# Altium PCB EPS.PcbDoc (part 1 of 2)
Units mm, origin at the board's own origin, x right, y up, seen from the top; angles counter-clockwise.
Board outline 98 x 78 mm, 4 copper layers (Top Layer, GND 1, GND 2, Bottom Layer), stack 1.592 mm thick; 124 components, 111 nets, 472 pads, 878 vias.
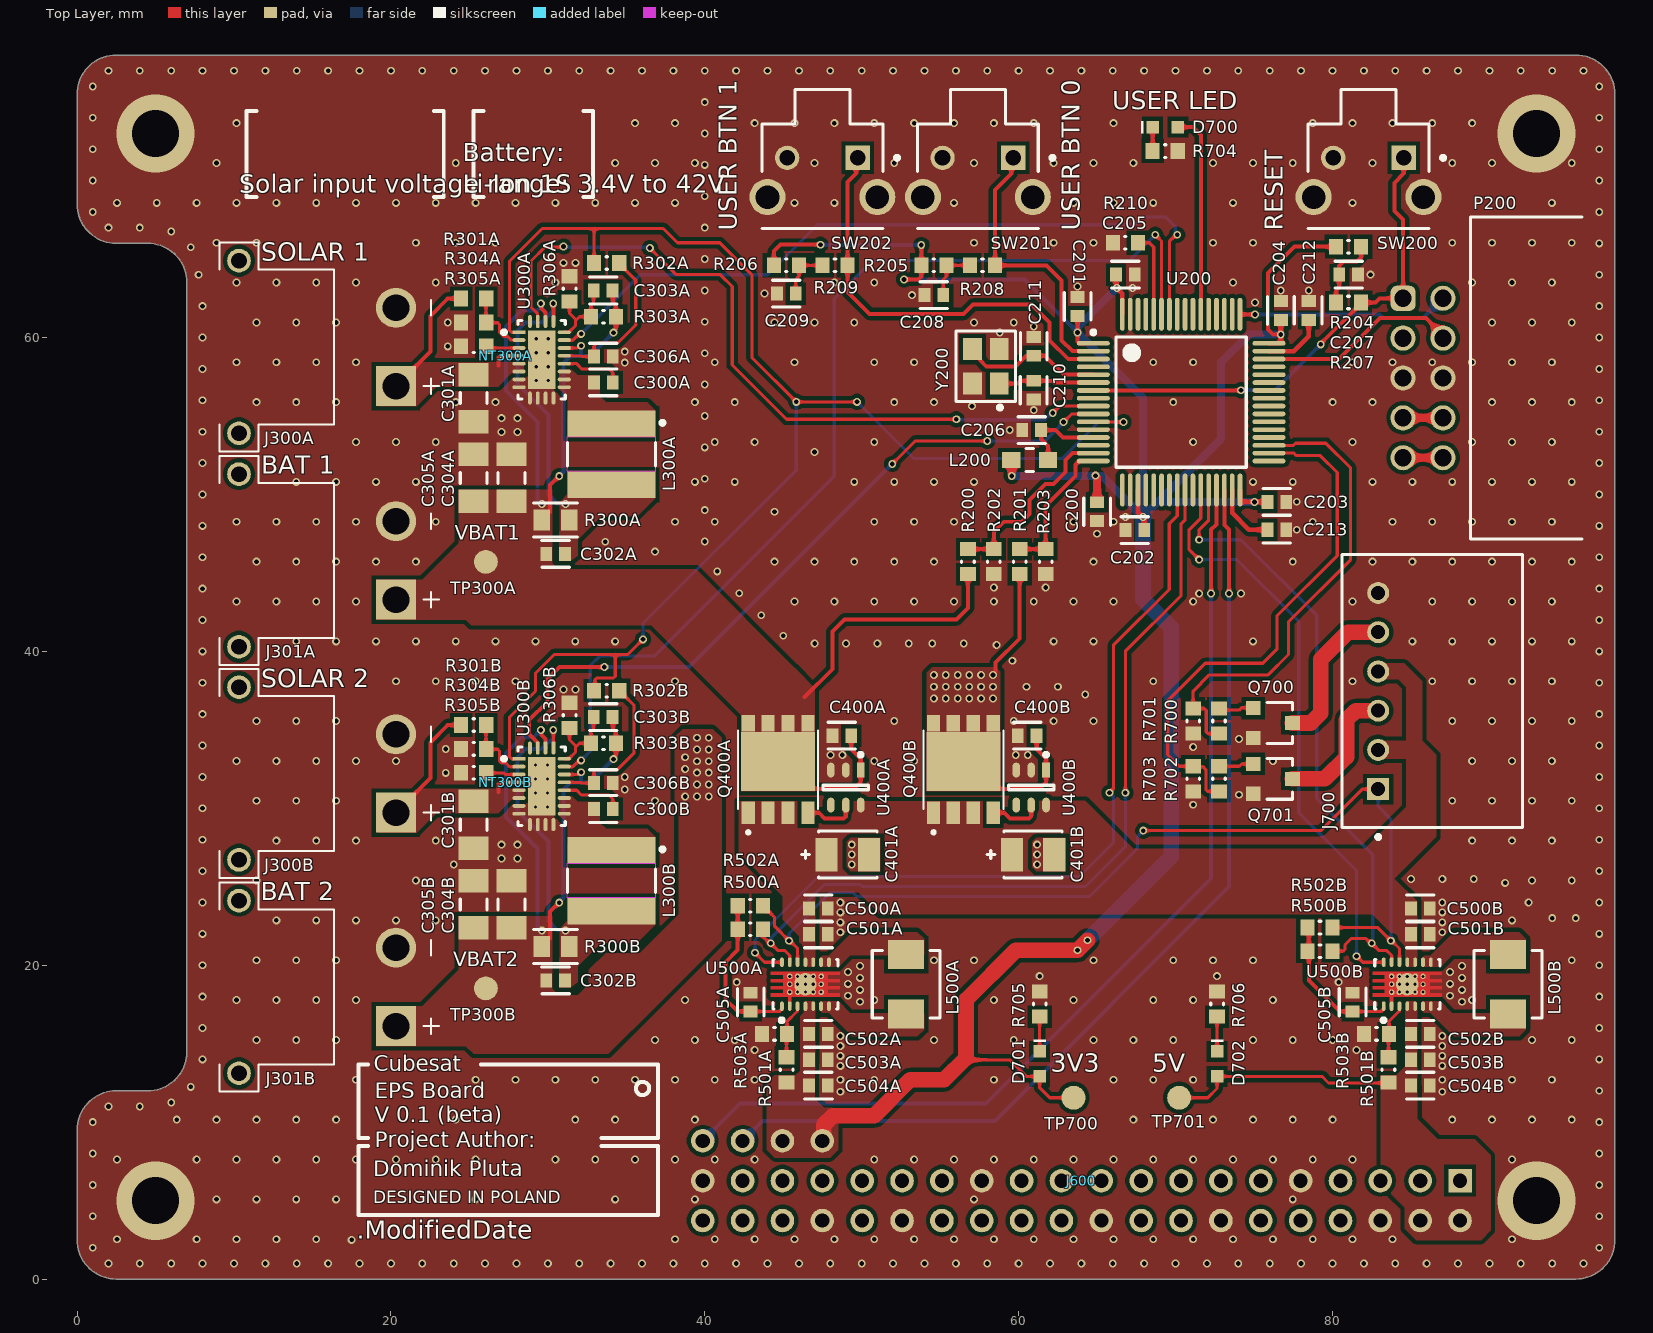
[diagram p0: Top Layer view]
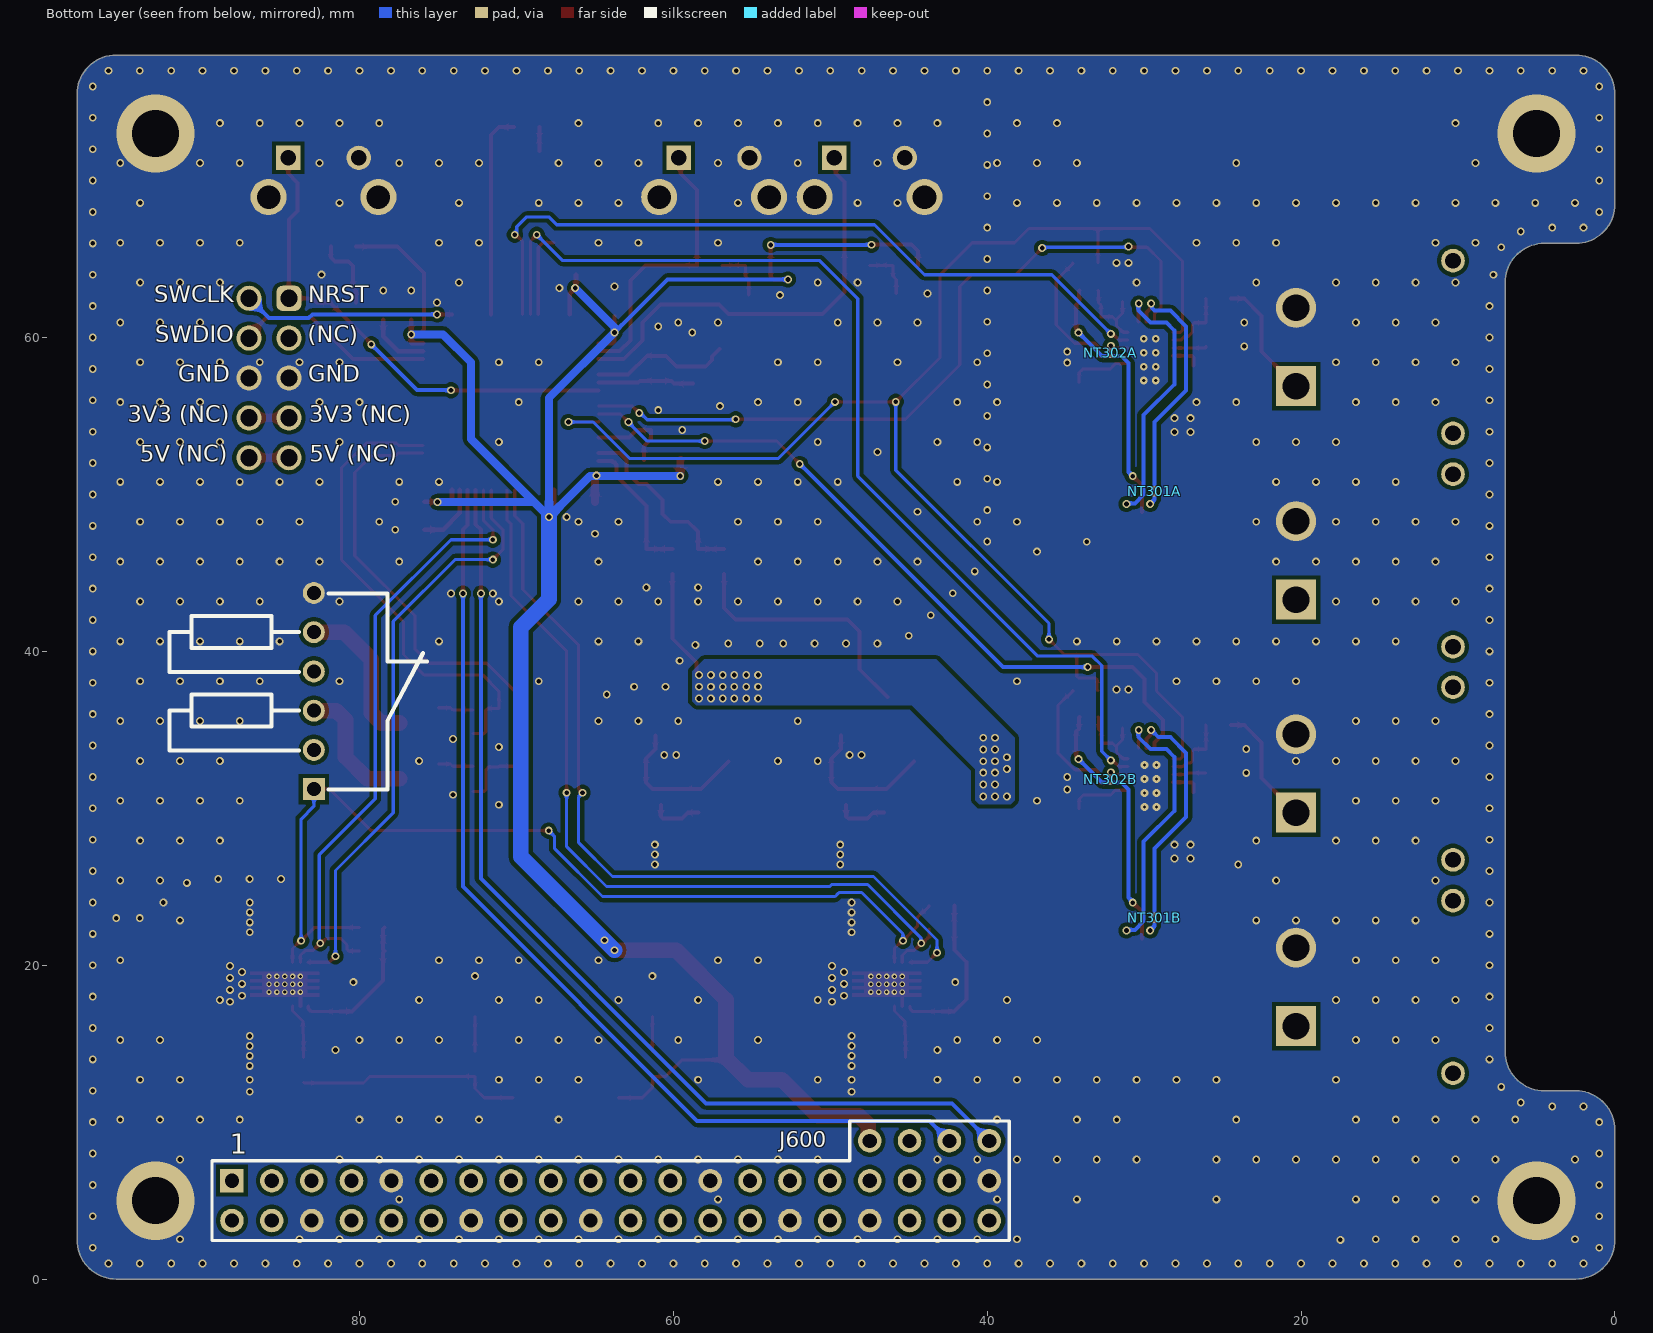
[diagram p1: Bottom Layer view, seen from below]
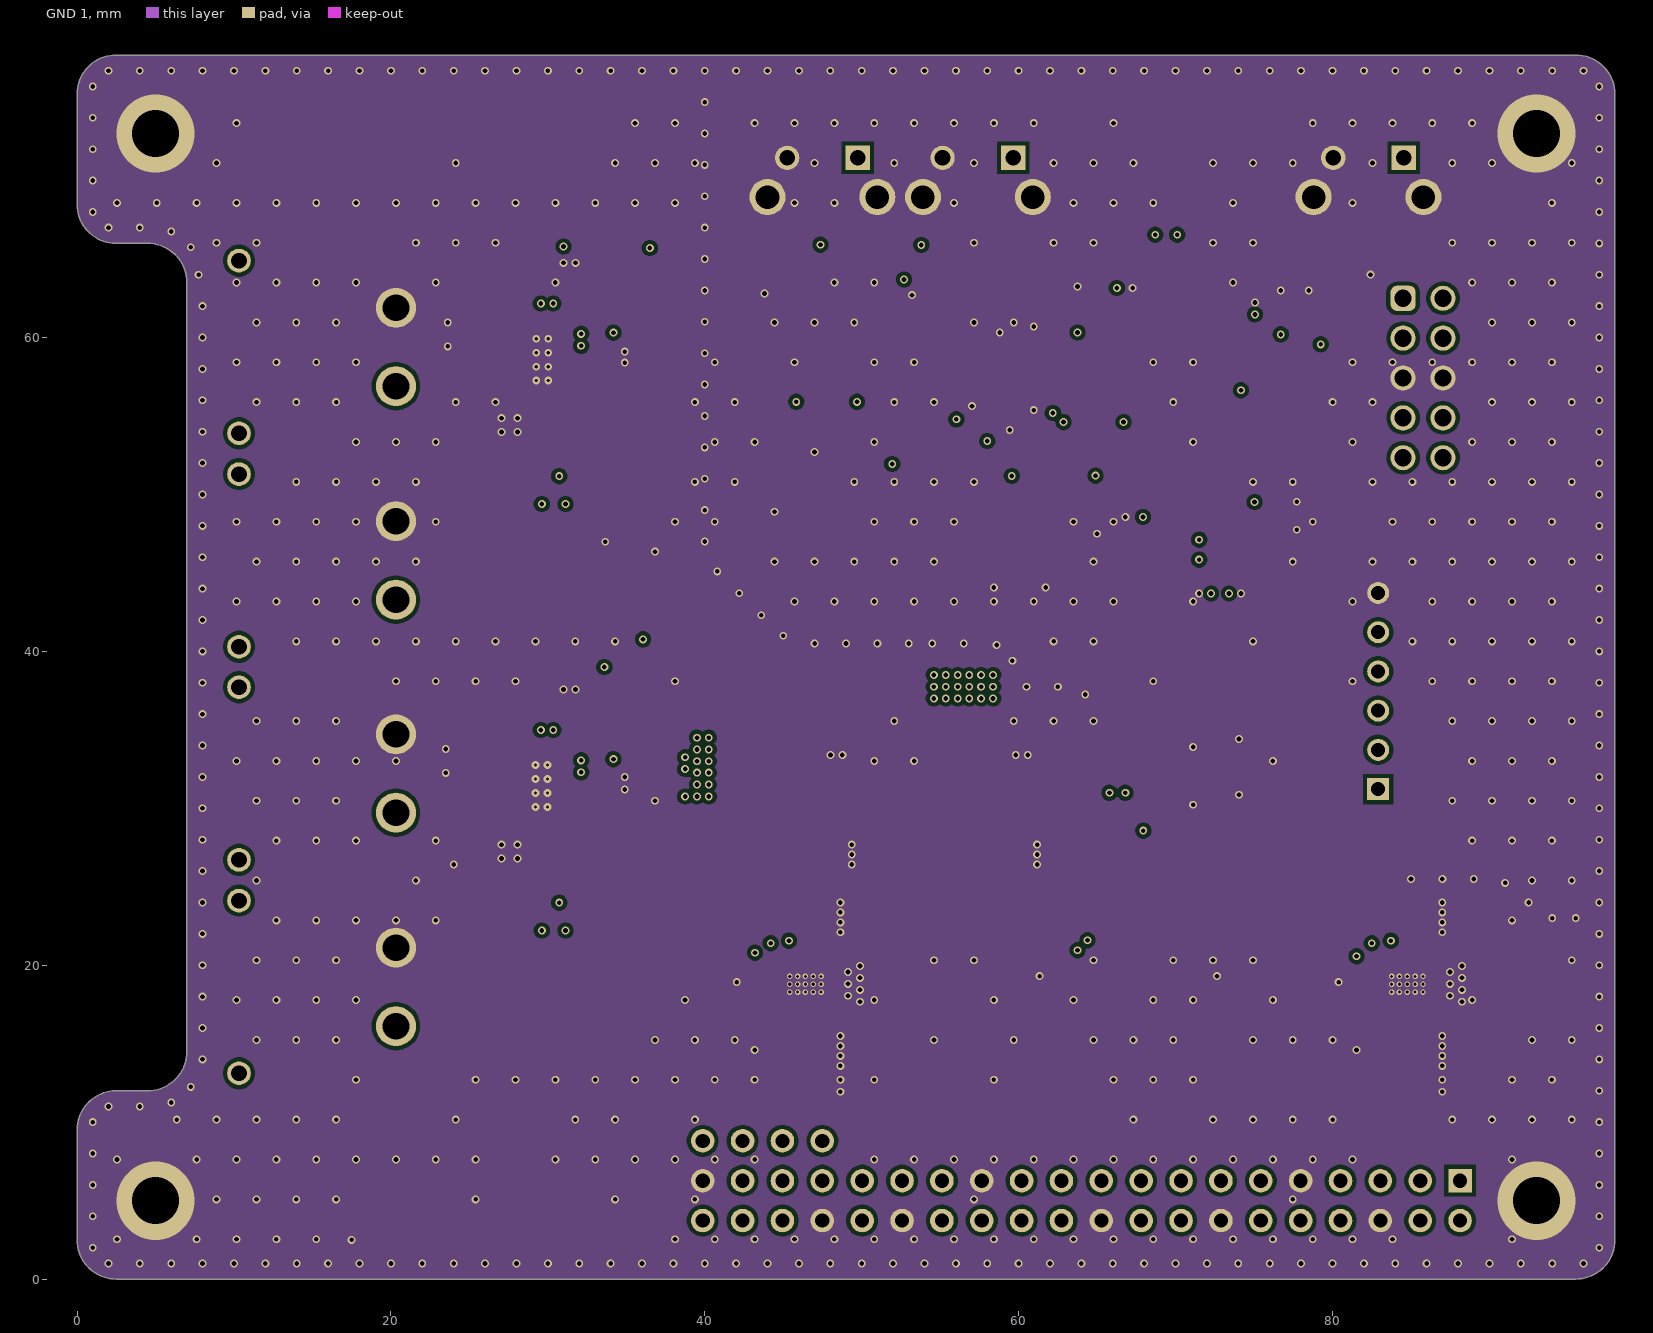
[diagram p2: GND 1]
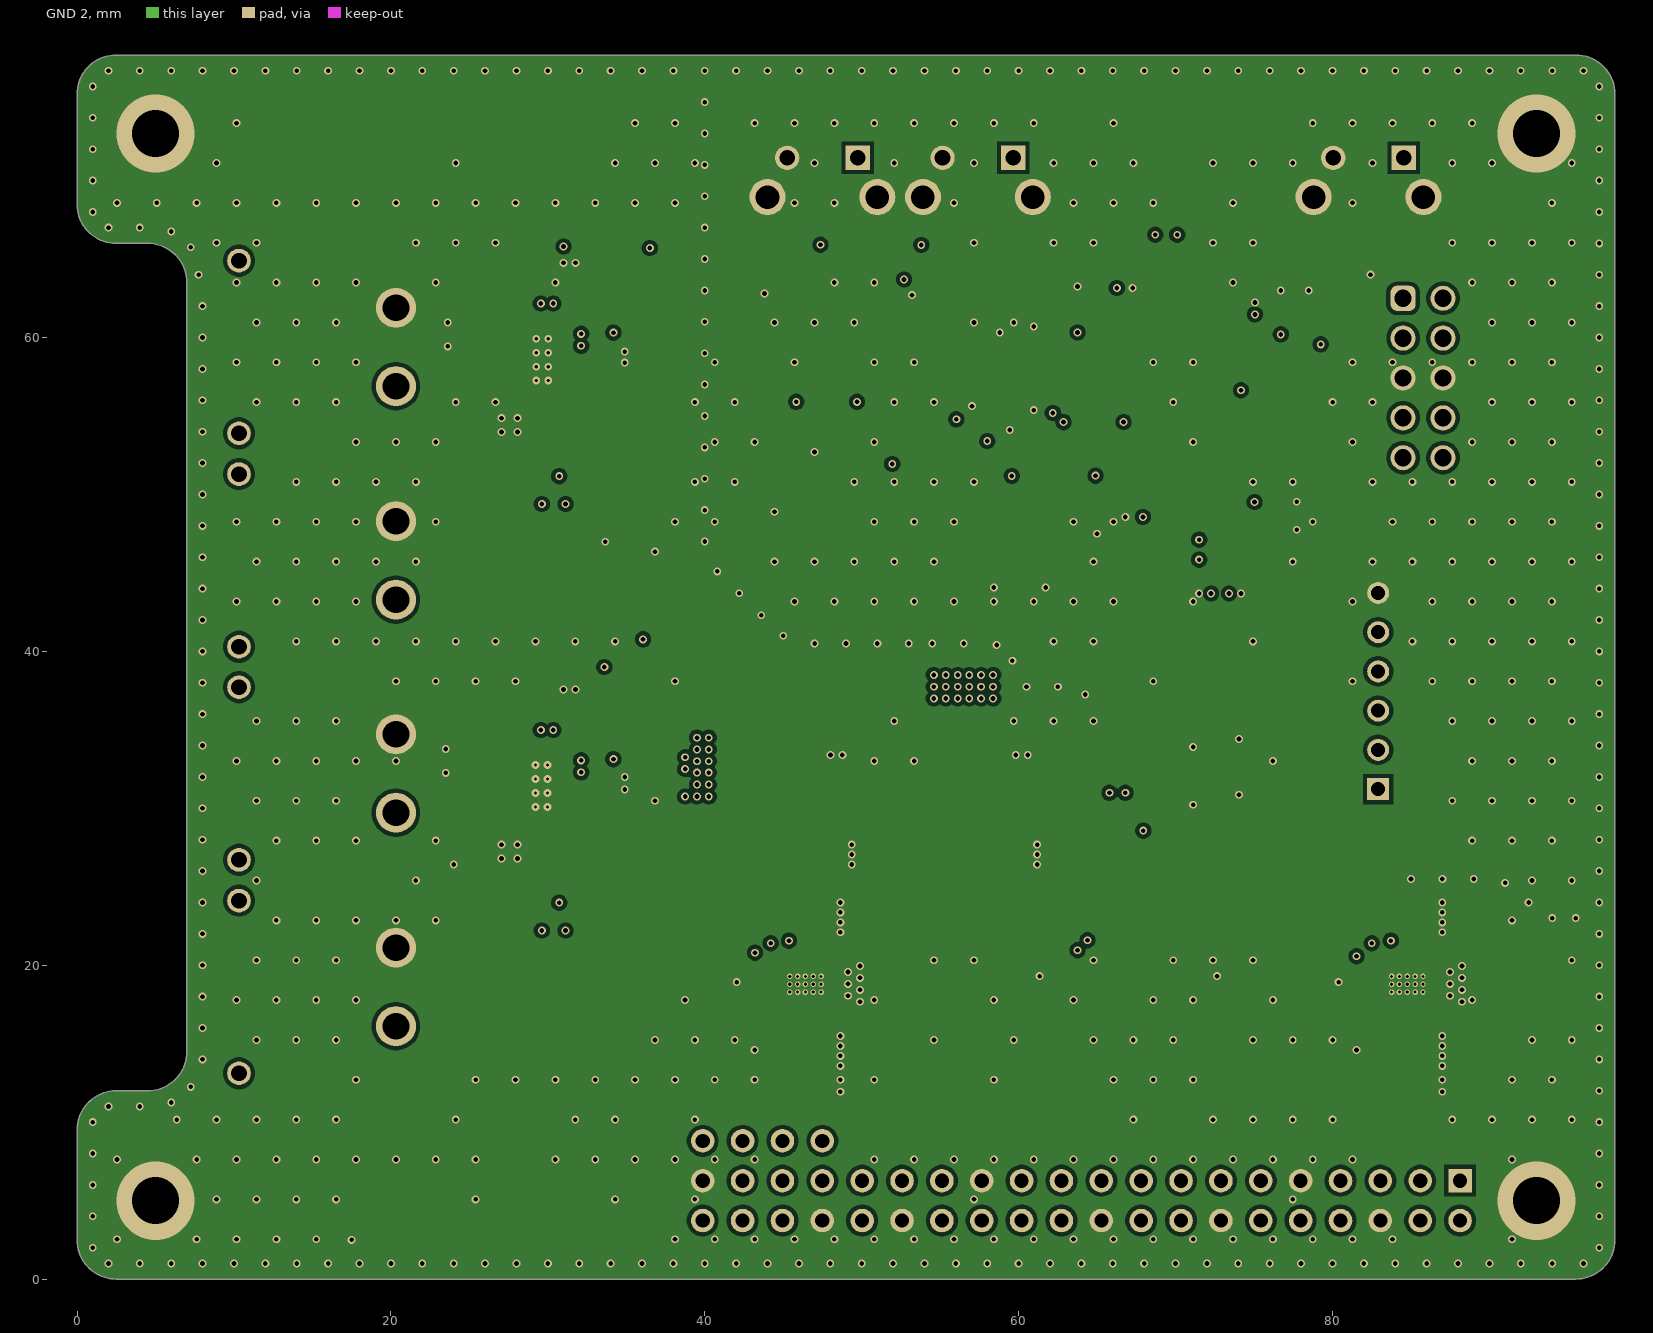
[diagram p3: GND 2]

## Layer stack, top to bottom
Top Solder: solder mask 0.0102, Solder Resist, Dk 3.5
Top Layer: signal copper 0.0356
Dielectric 2: prepreg 0.2104, PP-006, Dk 4.4
GND 1: signal copper 0.0175
Dielectric 1: dielectric 1.065, FR-4, Dk 4.6
GND 2: signal copper 0.0175
Dielectric 3: prepreg 0.2104, PP-006, Dk 4.4
Bottom Layer: signal copper 0.0356
Bottom Solder: solder mask 0.0102, Solder Resist, Dk 3.5

## Board outline
2.5,0 95.5,0 ccw(c95.5,2.5) 98,2.5 98,75.5 ccw(c95.5,75.5) 95.5,78 2.5,78 ccw(c2.5,75.5) 0,75.5 0,68.5 ccw(c2.5,68.5) 2.5,66 4.5,66 cw(c4.5,63.5) 7,63.5 7,14.5 cw(c4.5,14.5) 4.5,12 2.5,12 ccw(c2.5,9.5) 0,9.5 0,2.5 ccw(c2.5,2.5)

## Design rules (kind name [scope] priority, off if disabled: settings)
Clearance "Stitching GND" [IsStitchingVia and InNet('GND') vs (IsVia and (Not IsStitchingVia)) Or IsPad] p1: gap=0.127 ignorepadtopadclearanceinfootprint=FALSE
Clearance [All] p2: gap=0.254 ignorepadtopadclearanceinfootprint=TRUE except(0: Arc-Hole Track-Hole SMDPad-Hole THPad-Hole Via-Hole Fill-Hole Poly-Hole Region-Hole Text-Hole; 0.127: Arc-Arc Arc-Track Arc-SMDPad Track-Track Track-SMDPad SMDPad-SMDPad; 0.5: THPad-THPad)
HoleSize [All] p1: absolutevalues=TRUE maxlimit=6.3 minlimit=0.2 maxpercent=80.000 minpercent=20.000
MinimumSolderMaskSliver [All] p1: minsoldermaskwidth=0.038
PolygonConnect [All] p1: connectstyle=Direct reliefconductorwidth=0.254 reliefentries=4 polygonreliefangle="90 Angle" airgapwidth=0.254
RoomDefinition MPPT_charger1 [InComponentClass('MPPT_charger1')] p1: confinementstyle=ConfineIn formatcopy=TRUE lockcomponents=FALSE outline 7,38.847 39.766,38.847 39.766,66.406 7,66.406
RoomDefinition MPPT_charger2 [InComponentClass('MPPT_charger2')] p2: confinementstyle=ConfineIn formatcopy=TRUE lockcomponents=FALSE outline 7,11.669 39.766,11.669 39.766,39.228 7,39.228
RoomDefinition ideal_diode1 [InComponentClass('ideal_diode1')] p3: confinementstyle=ConfineIn formatcopy=TRUE lockcomponents=FALSE outline 40.64,37.084 40.64,25.019 52.416,25.019 52.416,37.084
RoomDefinition ideal_diode2 [InComponentClass('ideal_diode2')] p4: confinementstyle=ConfineIn formatcopy=TRUE lockcomponents=FALSE outline 52.451,37.084 52.451,25.019 64.227,25.019 64.227,37.084
RoomDefinition buck_boost2 [InComponentClass('buck_boost2')] p5: confinementstyle=ConfineIn formatcopy=TRUE lockcomponents=FALSE outline 77.343,24.892 77.343,10.541 94.615,10.541 94.615,24.892
RoomDefinition buck_boost1 [InComponentClass('buck_boost1')] p6: confinementstyle=ConfineIn formatcopy=TRUE lockcomponents=FALSE outline 40.513,24.892 40.513,10.541 56.261,10.541 56.261,24.892
RoutingVias [All] p1: holewidth=0.3 width=0.5 viastyle="Through Hole" minholewidth=0.2 minwidth=0.5 maxholewidth=6.3 maxwidth=6.5
SilkToSilkClearance [All] p1: silktosilkclearance=0.05
SilkToSolderMaskClearance [IsPad] p1: minsilkscreentomaskgap=0.1 clearancetoexposedcopper=TRUE
SolderMaskExpansion SolderMaskExpansion_Vias [IsVia] p1: expansion=0.102 istentingtop=TRUE
SolderMaskExpansion [All] p2: expansion=0.102 istentingtop=FALSE
Width [All] p1: maxlimit=2.54 minlimit=0.127 preferedwidth=0.5 midlayer1_minwidth=0.254 midlayer1_maxwidth=0.254 midlayer1_prefwidth=0.254 midlayer2_minwidth=0.254 midlayer2_maxwidth=0.254 midlayer2_prefwidth=0.254 minimp=50.000000 maximp=50.000000 favimp=50.000000
26 further rules are at their usual default settings.

## Classes and differential pairs
component class Peripherals: D700 D701 D702 J700 Q700 Q701 R700 R701 R702 R703 R704 R705 R706 TP700 TP701
component class "Main connector": J600 l
channel class ideal_diode: ideal_diode1 ideal_diode2
component class ideal_diode2: C400B C401B Q400B U400B
component class ideal_diode1: C400A C401A Q400A U400A
channel class buck_boost: buck_boost1 buck_boost2
component class buck_boost2: C500B C501B C502B C503B C504B C505B L500B R500B R501B R502B R503B U500B
component class buck_boost1: C500A C501A C502A C503A C504A C505A L500A R500A R501A R502A R503A U500A
channel class MPPT_charger: MPPT_charger1 MPPT_charger2
component class uC: C200 C201 C202 C203 C204 C205 C206 C207 C208 C209 C210 C211 C212 C213 L200 P200 R200 R201 R202 R203 R204 R205 R206 R207 R208 R209 R210 SW200 SW201 SW202 U200 Y200
component class MPPT_charger2: C300B C301B C302B C303B C304B C305B C306B J300B J301B L300B NT300B NT301B NT302B R300B R301B R302B R303B R304B R305B R306B TP300B U300B
component class MPPT_charger1: C300A C301A C302A C303A C304A C305A C306A J300A J301A L300A NT300A NT301A NT302A R300A R301A R302A R303A R304A R305A R306A TP300A U300A

## Components (designator, comment, footprint, x,y, rotation, side; value= is the part's Value field where it differs from the comment)
C200 "4u7" FP-C0603C-CF-MFG 65,48.9 r270 top value="0.10 μF"
C201 "100n" FP-C0603C-CF-MFG 63.754,61.976 r90 top
C202 "100n" FP-C0603C-CF-MFG 67.406,47.726 r180 top
C203 "100n" FP-C0603C-CF-MFG 76.454,49.53 r0 top
C204 "100n" FP-C0603C-CF-MFG 76.708,61.722 r90 top
C205 "100n" FP-C0603C-CF-MFG 66.802,64.008 r0 top
C206 "1u" FP-C0603C-CF-MFG 60.833,54.102 r180 top value="0.10 μF"
C207 "100n" FP-C0603C-CF-MFG 81.026,64.008 r0 top
C208 "100n" FP-C0603C-CF-MFG 54.6,62.7 r180 top
C209 "100n" FP-C0603C-CF-MFG 45.2,62.8 r180 top
C210 "20p" FP-C0603C-CF-MFG 60.96,56.642 r270 top value="0.10 μF"
C211 "20p" FP-C0603C-CF-MFG 60.96,59.436 r90 top value="0.10 μF"
C212 "2u2" FP-C0603C-CF-MFG 78.486,61.722 r90 top value="0.10 μF"
C213 "2u2" FP-C0603C-CF-MFG 76.454,47.752 r0 top value="0.10 μF"
C300A "100n" FP-C0603C-CF-MFG 33.543,57.135 r180 top value="0.10 μF" (schematic designator C300)
C300B "100n" FP-C0603C-CF-MFG 33.543,29.957 r180 top value="0.10 μF" (schematic designator C300)
C301A "10u" KEMT-1206-2_M 25.273,56.134 r90 top (schematic designator C301)
C301B "10u" KEMT-1206-2_M 25.273,28.956 r90 top (schematic designator C301)
C302A "1u" FP-C0603C-CF-MFG 30.495,46.213 r180 top value="0.10 μF" (schematic designator C302)
C302B "1u" FP-C0603C-CF-MFG 30.495,19.035 r180 top value="0.10 μF" (schematic designator C302)
C303A "10p" FP-C0603C-CF-MFG 33.528,62.992 r180 top value="0.10 μF" (schematic designator C303)
C303B "10p" FP-C0603C-CF-MFG 33.528,35.814 r180 top value="0.10 μF" (schematic designator C303)
C304A "22u" KEMT-1206-2_M 27.686,51.054 r270 top (schematic designator C304)
C304B "22u" KEMT-1206-2_M 27.686,23.876 r270 top (schematic designator C304)
C305A "22u" KEMT-1206-2_M 25.273,51.054 r270 top (schematic designator C305)
C305B "22u" KEMT-1206-2_M 25.273,23.876 r270 top (schematic designator C305)
C306A "1u" FP-C0603C-CF-MFG 33.543,58.786 r0 top value="0.10 μF" (schematic designator C306)
C306B "1u" FP-C0603C-CF-MFG 33.543,31.608 r0 top value="0.10 μF" (schematic designator C306)
C400A "100n" FP-C0603C-CF-MFG 48.733,34.627 r180 top (schematic designator C400)
C400B "100n" FP-C0603C-CF-MFG 60.544,34.627 r180 top (schematic designator C400)
C401A "22u" FP-T491B107K006AT-MFG 49.114,27.051 r180 top (schematic designator C401)
C401B "22u" FP-T491B107K006AT-MFG 60.925,27.051 r180 top (schematic designator C401)
C500A "10u" FP-C0603C-CF-MFG 47.244,23.622 r0 top (schematic designator C500)
C500B "10u" FP-C0603C-CF-MFG 85.598,23.622 r0 top (schematic designator C500)
C501A "10u" FP-C0603C-CF-MFG 47.244,21.971 r0 top (schematic designator C501)
C501B "10u" FP-C0603C-CF-MFG 85.598,21.971 r0 top (schematic designator C501)
C502A "22u" FP-C0603C-CF-MFG 47.244,15.629 r0 top (schematic designator C502)
C502B "22u" FP-C0603C-CF-MFG 85.598,15.629 r0 top (schematic designator C502)
C503A "22u" FP-C0603C-CF-MFG 47.244,13.978 r0 top (schematic designator C503)
C503B "22u" FP-C0603C-CF-MFG 85.598,13.978 r0 top (schematic designator C503)
C504A "22u" FP-C0603C-CF-MFG 47.244,12.327 r0 top (schematic designator C504)
C504B "22u" FP-C0603C-CF-MFG 85.598,12.327 r0 top (schematic designator C504)
C505A "100n" FP-C0603C-CF-MFG 42.926,17.653 r90 top (schematic designator C505)
C505B "100n" FP-C0603C-CF-MFG 81.28,17.653 r90 top (schematic designator C505)
D700 "LED" WL-SMCW_0603_150060xx75000 69.342,73.406 r0 top
D701 "LED" WL-SMCW_0603_150060xx75000 61.341,13.716 r270 top
D702 "LED" WL-SMCW_0603_150060xx75000 72.644,13.716 r270 top
J300A "XT30PW-M" AMASS_XT30PW-M 10.32,59.396 r90 top (schematic designator J300)
J300B "XT30PW-M" AMASS_XT30PW-M 10.32,32.218 r90 top (schematic designator J300)
J301A "XT30PW-M" AMASS_XT30PW-M 10.32,45.793 r90 top (schematic designator J301)
J301B "XT30PW-M" AMASS_XT30PW-M 10.32,18.615 r90 top (schematic designator J301)
J600 "RPI GPIO Connector + 4 Cubesat pins" rpi 88.13,6.27 r180 top
J700 "S6B-XH-A (LF)(SN)" FP-S6B-XH-A_LF_SN-MFG 86.36,37.473 r270 top
L200 "4u7" FP-LQM21DN_00-MFG 60.706,52.197 r0 top
L300A "10u" WE-MAPI_5030 34.051,52.563 r270 top (schematic designator L300)
L300B "10u" WE-MAPI_5030 34.051,25.385 r270 top (schematic designator L300)
L500A "1u5" FP-IHLP-1616BZ-FP_1_8545x-MFG 52.832,18.788 r270 top (schematic designator L500)
L500B "1u5" FP-IHLP-1616BZ-FP_1_8545x-MFG 91.186,18.788 r270 top (schematic designator L500)
NT300A "NetTie" NetTie 27.091,58.837 r0 top net-tie (schematic designator NT300)
NT300B "NetTie" NetTie 27.091,31.659 r0 top net-tie (schematic designator NT300)
NT301A "NetTie" NetTie 29.337,50.419 r270 bottom net-tie (schematic designator NT301)
NT301B "NetTie" NetTie 29.337,23.241 r270 bottom net-tie (schematic designator NT301)
NT302A "NetTie" NetTie 32.121,59.243 r270 bottom net-tie (schematic designator NT302)
NT302B "NetTie" NetTie 32.121,32.065 r270 bottom net-tie (schematic designator NT302)
P200 "61201021721" 61201021721 93.305,57.42 r90 top
Q400A "TPCA8120" TPCA8120 44.669,32.468 r90 top (schematic designator Q400)
Q400B "TPCA8120" TPCA8120 56.48,32.468 r90 top (schematic designator Q400)
Q700 "AO3400" AO-SOT23-3_V 76.2,35.433 r270 top
Q701 "AO3400" AO-SOT23-3_V 76.2,31.877 r270 top
R200 "10k" RESC0603(1608)_N 56.769,45.72 r270 top value="10000.00 Ohm"
R201 "10k" RESC0603(1608)_N 60.071,45.72 r270 top value="10000.00 Ohm"
R202 "33k" RESC0603(1608)_N 58.42,45.72 r90 top value="33000.00 Ohm"
R203 "33k" RESC0603(1608)_N 61.722,45.72 r90 top value="33000.00 Ohm"
R204 "10k" RESC0603(1608)_N 81.026,65.786 r180 top value="10000.00 Ohm"
R205 "10k" RESC0603(1608)_N 54.6,64.6 r180 top value="10000.00 Ohm"
R206 "10k" RESC0603(1608)_N 45.2,64.6 r180 top value="10000.00 Ohm"
R207 "100R" RESC0603(1608)_N 81.026,62.23 r180 top value="100.00 Ohm"
R208 "100R" RESC0603(1608)_N 57.7,64.6 r180 top value="100.00 Ohm"
R209 "100R" RESC0603(1608)_N 48.3,64.6 r180 top value="100.00 Ohm"
R210 "10k" RESC0603(1608)_N 66.802,66.04 r0 top value="10000.00 Ohm"
R300A "0.025R" FP-CR0805-IPC_B 30.495,48.372 r180 top (schematic designator R300)
R300B "0.025R" FP-CR0805-IPC_B 30.495,21.194 r180 top (schematic designator R300)
R301A "10k?" RESC0603(1608)_N 25.273,62.484 r180 top value="2000.00 Ohm" (schematic designator R301)
R301B "10k?" RESC0603(1608)_N 25.273,35.306 r180 top value="2000.00 Ohm" (schematic designator R301)
R302A "10k" RESC0603(1608)_N 33.75,64.75 r0 top value="2000.00 Ohm" (schematic designator R302)
R302B "10k" RESC0603(1608)_N 33.75,37.5 r0 top value="2000.00 Ohm" (schematic designator R302)
R303A "1M" RESC0603(1608)_N 33.543,61.326 r0 top value="1000000.00 Ohm" (schematic designator R303)
R303B "1M" RESC0603(1608)_N 33.543,34.148 r0 top value="1000000.00 Ohm" (schematic designator R303)
R304A "10k?" RESC0603(1608)_N 25.273,60.96 r0 top value="2000.00 Ohm" (schematic designator R304)
R304B "10k?" RESC0603(1608)_N 25.273,33.782 r0 top value="2000.00 Ohm" (schematic designator R304)
R305A "60k4" RESC0603(1608)_N 25.273,59.436 r0 top value="2000.00 Ohm" (schematic designator R305)
R305B "60k4" RESC0603(1608)_N 25.273,32.258 r0 top value="2000.00 Ohm" (schematic designator R305)
R306A "309k" RESC0603(1608)_N 31.384,63.104 r270 top value="309000.00 Ohm" (schematic designator R306)
R306B "309k" RESC0603(1608)_N 31.384,35.926 r270 top value="309000.00 Ohm" (schematic designator R306)
R500A "10k" RESC0603(1608)_N 42.9,22.3 r0 top value="10000.00 Ohm" (schematic designator R500)
R500B "10k" RESC0603(1608)_N 79.2,20.9 r0 top value="10000.00 Ohm" (schematic designator R500)
R501A "1M" RESC0603(1608)_N 45.212,13.335 r270 top value="1000000.00 Ohm" (schematic designator R501)
R501B "1M" RESC0603(1608)_N 83.566,13.335 r270 top value="1000000.00 Ohm" (schematic designator R501)
R502A "10k" RESC0603(1608)_N 42.9,23.8 r0 top value="10000.00 Ohm" (schematic designator R502)
R502B "10k" RESC0603(1608)_N 79.2,22.4 r0 top value="10000.00 Ohm" (schematic designator R502)
R503A "180k/110k" RESC0603(1608)_N 44.45,15.621 r0 top value="18000/110000 Ohm" (schematic designator R503)
R503B "180k/110k" RESC0603(1608)_N 82.804,15.621 r0 top value="18000/110000 Ohm" (schematic designator R503)
R700 "100R" RESC0603(1608)_N 72.771,35.56 r270 top value="100.00 Ohm"
R701 "10k" RESC0603(1608)_N 71.12,35.56 r90 top value="2000.00 Ohm"
R702 "100R" RESC0603(1608)_N 72.771,31.877 r270 top value="100.00 Ohm"
R703 "10k" RESC0603(1608)_N 71.12,31.877 r90 top value="2000.00 Ohm"
R704 "1k" RESC0603(1608)_N 69.342,71.882 r180 top value="1000.00 Ohm"
R705 "1k" RESC0603(1608)_N 61.341,17.526 r270 top value="1000.00 Ohm"
R706 "2k2" RESC0603(1608)_N 72.644,17.526 r270 top value="2200.00 Ohm"
SW200 "B3F-3122" FP-B3F-3122-MFG 82.296,71.374 r180 top
SW201 "B3F-3122" FP-B3F-3122-MFG 57.404,71.374 r180 top
SW202 "B3F-3122" FP-B3F-3122-MFG 47.498,71.374 r180 top
TP300A "TestPoint" Test-point 26.05,45.705 r0 top (schematic designator TP300)
TP300B "TestPoint" Test-point 26.05,18.527 r0 top (schematic designator TP300)
TP700 "TestPoint" Test-point 63.5,11.557 r90 top
TP701 "TestPoint" Test-point 70.231,11.557 r90 top
U200 "STM32F405RGT6" STM-LQFP64_M 70.358,55.88 r0 top
U300A "LT8611EUDD" FP-UDD-24-05-08-1833-IPC_B 29.606,58.583 r0 top (schematic designator U300)
U300B "LT8611EUDD" FP-UDD-24-05-08-1833-IPC_B 29.606,31.405 r0 top (schematic designator U300)
U400A "LTC4412ES6" FP-S6-6-05-08-1636-IPC_C 48.987,31.325 r270 top (schematic designator U400)
U400B "LTC4412ES6" FP-S6-6-05-08-1636-IPC_C 60.798,31.325 r270 top (schematic designator U400)
U500A "TPS63020DSJT" FP-DSJ0014A-MFG 46.414,18.791 r90 top (schematic designator U500)
U500B "TPS63020DSJT" FP-DSJ0014A-MFG 84.768,18.791 r90 top (schematic designator U500)
Y200 "8MHz" FP-7M-MFG 57.912,58.166 r90 top

## Footprints (in the part's own frame and the unit in brackets; to place one, negate y for a bottom-side part, rotate by r counter-clockwise, add the part's x,y. Pads: shape width x height; smd on the part's side, far side on the other; paste and mask are expansions set on the pad)
61201021721 [mm] "10 pins, right angled, gold plating"
  rrect50% 1.6x1.6 hole 1.1: 1(5.08,8.805)
  round 1.6 hole 1.1: 2(5.08,6.265) 3(2.54,8.805) 4(2.54,6.265) 5(0,8.805) 6(0,6.265) 7(-2.54,8.805) 8(-2.54,6.265) 9(-5.08,8.805) 10(-5.08,6.265)
  silkscreen extent -10.26,-2.6 10.26,4.5, body extent -10.18,-4.42 10.18,9.13, height 9.23
AMASS_XT30PW-M [mm]
  round 2.55 hole 1.7: N(2.5,-10)
  rect 2.55x2.55 / inner round 2.55 / far side rect 2.55x2.55 hole 1.7: P(-2.5,-10)
  round 1.508 hole 1: S1(5.5,0) S2(-5.5,0)
  silkscreen extent -6.65,-12.75 6.65,1.25, body extent -6.65,-11 6.65,2.95, height 5
AO-SOT23-3_V [mm] "SOT23, 3-Leads, Body 3.016x2.8mm, Pitch 0.95mm"
  rect 0.9x0.95 smd: 1(-0.95,-1.25) 2(0.95,-1.25) 3(0,1.25)
  silkscreen extent -1.3,-0.38 1.3,1.25, body extent -1.14,-1.25 1.17,1.36, height 1.25
FP-7M-MFG [mm]
  rect 1.4x1.2 smd paste+0 mask+0: 1(-1.1,-0.85) 2(1.1,-0.85) 3(1.1,0.85) 4(-1.1,0.85)
  silkscreen extent -2.75,-1.9 2.25,1.9, body extent -1.9,-1.55 1.9,1.55, height 0.25
FP-B3F-3122-MFG [mm]
  rect 1.55x1.55 hole 1 paste-2539.97 mask+0: 1(-2.25,-0.075)
  round 1.55 hole 1 paste-2539.97 mask+0: 2(2.25,-0.075)
  round 2.3 hole 1.5 paste-2539.97 mask+0: 3(-3.5,2.425) 4(3.5,2.425)
  silkscreen extent -4.88,-4.43 3.85,4.43, body extent -4.75,-4.52 4.75,4.52, height 0.25
FP-C0603C-CF-MFG [mm]
  rect 0.75x0.9 smd paste+0 mask+0: 1(-0.6,0) 2(0.6,0)
  silkscreen extent -0.87,-0.85 0.88,0.85, body extent -1.2,-0.6 1.2,0.6, height 0.25
FP-CR0805-IPC_B [mm]
  rect 1.058x1.362 smd paste+0 mask+0: 1(-0.877,0) 2(0.877,0)
  silkscreen extent -1.41,-1.08 1.41,1.08, body extent -1.66,-0.93 1.66,0.93, height 0.25
FP-DSJ0014A-MFG [mm]
  rrect100% 0.6x0.24 smd paste+0 mask+0: 1(-1.4,1.5) 2(-1.4,1) 3(-1.4,0.5) 4(-1.4,0) 5(-1.4,-0.5) 6(-1.4,-1) 7(-1.4,-1.5) 8(1.4,-1.5) 9(1.4,-1) 10(1.4,-0.5) 11(1.4,0) 12(1.4,0.5) 13(1.4,1) 14(1.4,1.5)
  round 1.422 smd paste-1000 mask+0: 15(0,0)
  Top Layer region: -0.79,2.2 -0.59,2.2 -0.59,1.425 -0.33,1.425 -0.33,2.2 -0.13,2.2 -0.13,1.425 0.13,1.425 0.13,2.2 0.33,2.2 0.33,1.425 0.59,1.425 0.59,2.2 0.79,2.2 0.79,-2.2 0.59,-2.2 0.59,-1.425 0.33,-1.425 0.33,-2.2 0.13,-2.2 0.13,-1.425 -0.13,-1.425 -0.13,-2.2 -0.33,-2.2 -0.33,-1.425 -0.59,-1.425 -0.59,-2.2 -0.79,-2.2 -0.79,2.2
  silkscreen extent -2.42,-2.07 1.58,2.07, body extent -1.8,-2.3 1.8,2.3, height 0.25
FP-IHLP-1616BZ-FP_1_8545x-MFG [mil]
  rect 73.01x90 smd paste+0 mask+0: 1(-74.5,0) 2(74.5,0)
  silkscreen extent -85,-85 85,85, body extent -115,-89 115,89, height 10
FP-LQM21DN_00-MFG [mm]
  rect 1.15x1 smd paste+0 mask+0: 1(-1.175,0) 2(1.175,0)
  silkscreen extent -0.23,-0.72 0.23,0.72, body extent -1.85,-0.82 1.85,0.82, height 0.25
FP-S6-6-05-08-1636-IPC_C [mm]
  rect 0.94x0.486 smd paste+0 mask+0: 1(-1.115,0.95)
  rrect100% 0.94x0.486 smd paste+0 mask+0: 2(-1.115,0) 3(-1.115,-0.95) 4(1.116,-0.95) 5(1.116,0) 6(1.116,0.95)
  silkscreen extent -2.21,-1.45 0.15,1.45, body extent -1.69,-1.55 1.69,1.55, height 0.25
FP-S6B-XH-A_LF_SN-MFG [mm]
  rect 1.4x1.4 hole 0.9 paste-2539.97 mask+0: 1(6.25,-3.45)
  round 1.4 hole 0.9 paste-2539.97 mask+0: 2(3.75,-3.45) 3(1.25,-3.45) 4(-1.25,-3.45) 5(-3.75,-3.45) 6(-6.25,-3.45)
  silkscreen extent -8.7,-5.75 9.42,5.75, body extent -8.8,-5.85 8.8,5.85, height 0.25
FP-T491B107K006AT-MFG [mm]
  rect 1.42x2.13 smd paste+0 mask+0: 1(-1.35,0) 2(1.35,0)
  silkscreen extent -1.85,-1.5 2.95,1.5, body extent -2.18,-1.62 2.18,1.62, height 0.25
FP-UDD-24-05-08-1833-IPC_B [mm]
  rect 0.831x0.242 smd paste+0 mask+0: 1(-1.441,1.75)
  rrect100% 0.831x0.242 smd paste+0 mask+0: 2(-1.441,1.25) 3(-1.441,0.75) 4(-1.441,0.25) 5(-1.441,-0.25) 6(-1.441,-0.75) 7(-1.441,-1.25) 8(-1.441,-1.75) 13(1.441,-1.75) 14(1.441,-1.25) 15(1.441,-0.75) 16(1.441,-0.25) 17(1.441,0.25) 18(1.441,0.75) 19(1.441,1.25) 20(1.441,1.75)
  rrect100% 0.242x0.831 smd paste+0 mask+0: 9(-0.75,-2.441) 10(-0.25,-2.441) 11(0.25,-2.441) 12(0.75,-2.441) 21(0.75,2.441) 22(0.25,2.441) 23(-0.25,2.441) 24(-0.75,2.441)
  rect 1.75x3.75 smd paste-1000 mask+0: 25(0,0)
  silkscreen extent -2.53,-2.5 1.5,2.5, body extent -2.11,-3.11 2.11,3.11, height 0.25
KEMT-1206-2_M [mm] "SMD, 2-Leads, Body 3.4x1.8mm, IPC Low Density"
  rect 1.5x1.9 smd: 1(-1.5,0) 2(1.5,0)
  silkscreen extent -0.35,-0.85 0.35,0.85, body extent -1.7,-0.9 1.7,0.9, height 0.88
NetTie [mil]
  rect 10x10 smd mask-196.85: 1(0,0) 2(17,0)
  Top Layer region: 2.9,-5 13.9,-5 13.9,5 2.9,5
RESC0603(1608)_N [mm] "Chip Resistor, Body 1.6x0.8mm, IPC Medium Density"
  rect 0.9x1 smd: 1(-0.8,0) 2(0.8,0)
  silkscreen extent -0.05,-0.4 0.05,0.4, body extent -0.85,-0.47 0.85,0.47, height 0.6
rpi [mm]
  rect 1.5x1.5 hole 0.9: 1(0,0)
  round 1.5 hole 0.9: 2(0,2.54) 3(2.54,0) 4(2.54,2.54) 5(5.08,0) 6(5.08,2.54) 7(7.62,0) 8(7.62,2.54) 9(10.16,0) 10(10.16,2.54) 11(12.7,0) 12(12.7,2.54) 13(15.24,0) 14(15.24,2.54) 15(17.78,0) 16(17.78,2.54) 17(20.32,0) 18(20.32,2.54) 19(22.86,0) 20(22.86,2.54) 21(25.4,0) 22(25.4,2.54) 23(27.94,0) 24(27.94,2.54) 25(30.48,0) 26(30.48,2.54) 27(33.02,0) 28(33.02,2.54) 29(35.56,0) 30(35.56,2.54) 31(38.1,0) 32(38.1,2.54) 33(40.64,0) 34(40.64,2.54) 35(43.18,0) 36(43.18,2.54) 37(45.72,0) 38(45.72,2.54) 39(48.26,0) 40(48.26,2.54) 41(40.64,-2.54) 42(43.18,-2.54) 43(45.72,-2.54) 44(48.26,-2.54)
  body extent -1.27,-3.74 49.96,3.77, height 8.5
STM-LQFP64_M [mm] "Thin QFP, 64-Leads, Body 10x10mm, Pitch 0.5mm, IPC Low Density"
  oval 2.1x0.3 smd: 1(-5.6,3.75) 2(-5.6,3.25) 3(-5.6,2.75) 4(-5.6,2.25) 5(-5.6,1.75) 6(-5.6,1.25) 7(-5.6,0.75) 8(-5.6,0.25) 9(-5.6,-0.25) 10(-5.6,-0.75) 11(-5.6,-1.25) 12(-5.6,-1.75) 13(-5.6,-2.25) 14(-5.6,-2.75) 15(-5.6,-3.25) 16(-5.6,-3.75) 33(5.6,-3.75) 34(5.6,-3.25) 35(5.6,-2.75) 36(5.6,-2.25) 37(5.6,-1.75) 38(5.6,-1.25) 39(5.6,-0.75) 40(5.6,-0.25) 41(5.6,0.25) 42(5.6,0.75) 43(5.6,1.25) 44(5.6,1.75) 45(5.6,2.25) 46(5.6,2.75) 47(5.6,3.25) 48(5.6,3.75)
  oval 0.3x2.1 smd: 17(-3.75,-5.6) 18(-3.25,-5.6) 19(-2.75,-5.6) 20(-2.25,-5.6) 21(-1.75,-5.6) 22(-1.25,-5.6) 23(-0.75,-5.6) 24(-0.25,-5.6) 25(0.25,-5.6) 26(0.75,-5.6) 27(1.25,-5.6) 28(1.75,-5.6) 29(2.25,-5.6) 30(2.75,-5.6) 31(3.25,-5.6) 32(3.75,-5.6) 49(3.75,5.6) 50(3.25,5.6) 51(2.75,5.6) 52(2.25,5.6) 53(1.75,5.6) 54(1.25,5.6) 55(0.75,5.6) 56(0.25,5.6) 57(-0.25,5.6) 58(-0.75,5.6) 59(-1.25,5.6) 60(-1.75,5.6) 61(-2.25,5.6) 62(-2.75,5.6) 63(-3.25,5.6) 64(-3.75,5.6)
  silkscreen extent -5.72,-4.15 4.15,4.57, body extent -5,-5 5,5, height 1.6
Test-point [mil] "SMD test point 60 mil"
  round 60 smd: 1(0,0)
TPCA8120 [mm]
  rect 1.45x0.85 smd: 1(-2.75,1.905) 2(-2.75,0.635) 3(-2.75,-0.635) 4(-2.75,-1.905)
  rect 1.05x0.85 smd: 5(2.95,-1.905) 6(2.95,-0.635) 7(2.95,0.635) 8(2.95,1.905)
  rect 3.75x4.7 smd paste-3: 9(0.508,0)
  silkscreen extent -4.1,-2.55 2.5,2.55, body extent -3,-2.65 3,2.65, height 1
WE-MAPI_5030 [mm] "SMD Power Inductor, 2-leads, body 5.6x5.6mm"
  rect 1.7x5.6 smd: 1(-1.95,0) 2(1.95,0)
  Top Layer keep-out region: -1.1,2.8 1.1,2.8 1.1,-2.8 -1.1,-2.8
  silkscreen extent -2.12,-2.8 0.75,3.38, body extent -2.7,-2.7 2.7,2.7, height 3.1
WL-SMCW_0603_150060xx75000 [mm] "SMD Mono-color Chip LED, body 1.6x0.8mm"
  rect 0.8x0.8 smd: 1(-0.8,0) 2(0.8,0)
  silkscreen extent -1.55,-0.4 -1.4,0.4, body extent -0.8,-0.4 0.8,0.4, height 0.7

## Part data
C200 C206: library part CMP-2006-03061-2, "CAP CER 0.1UF 50V X7R 0603", Capacitance="0.10 μF", Manufacturer=KEMET, Manufacturer Part Number=C0603C104K5RACTU, Package=C0603C-CF, Temperature="-55°C to +125°C", Temperature Characteristic=X7R, Temperature Coefficient=30ppm/°C, Temperature Range High=+125°C, Temperature Range Low=-55°C, Tolerance=0.1, Voltage Rating="50 V", Automotive=Yes, Automotive Grade="Grade 1", Category=Cap, ComponentLink2Description=Datasheet, ComponentLink2URL=https://api.kemet.com/component-edge/download/datasheet/C0603C100J5GACAUTO.pdf, Device Class L1="Passive Components", Device Class L2=Capacitors, Device Class L3="Ceramic Capacitors", Digikey Description="CAP CER 0.1UF 50V X7R 0603", Height=0.87mm, Lead Free=Yes, Material=Ceramic, Octopart=https://octopart.com/c0603c104k5ractu-kemet-139244, RoHS=TRUE
C201 C202 C203 C204 C205 C400A C400B C505A C505B: library part CMP-2006-03061-2, "CAP 0.1 μF, X5R or X7R ceramic", Capacitance="0.10 μF", Package=0603, Tolerance=10, Category=Cap, ComponentLink2Description=Datasheet, ComponentLink2URL=https://api.kemet.com/component-edge/download/datasheet/C0603C100J5GACAUTO.pdf, Device Class L1="Passive Components", Device Class L2=Capacitors, Device Class L3="Ceramic Capacitors", Material=Ceramic
C207 C208 C209: library part CMP-2006-03061-2, "CAP 0.1 μF, ceramic", Capacitance="0.10 μF", Package=0603, Tolerance=10, Category=Cap, ComponentLink2Description=Datasheet, ComponentLink2URL=https://api.kemet.com/component-edge/download/datasheet/C0603C100J5GACAUTO.pdf, Device Class L1="Passive Components", Device Class L2=Capacitors, Device Class L3="Ceramic Capacitors", Material=Ceramic
C210 C211 C212 C213 C300A C300B C302A C302B C303A C303B: library part CMP-2006-03061-2, "CAP CER 50V X7R 0603", Capacitance="0.10 μF", Manufacturer=KEMET, Manufacturer Part Number=C0603C104K5RACTU, Package=C0603C-CF, Temperature="-55°C to +125°C", Temperature Characteristic=X7R, Temperature Coefficient=30ppm/°C, Temperature Range High=+125°C, Temperature Range Low=-55°C, Tolerance=0.1, Voltage Rating="50 V", Automotive=Yes, Automotive Grade="Grade 1", Category=Cap, ComponentLink2Description=Datasheet, ComponentLink2URL=https://api.kemet.com/component-edge/download/datasheet/C0603C100J5GACAUTO.pdf, Device Class L1="Passive Components", Device Class L2=Capacitors, Device Class L3="Ceramic Capacitors", Digikey Description="CAP CER 0.1UF 50V X7R 0603", Height=0.87mm, Lead Free=Yes, Material=Ceramic, Octopart=https://octopart.com/c0603c104k5ractu-kemet-139244, RoHS=TRUE
C301A C301B C304A C304B C305A C305B: library part CMP-1037-04202-2, "CAP, Ceramic, 0.1 uF, +/- 10%, 50 V, -55 to 125 degC, 1206 (3216 Metric), RoHS, Tape and Reel", Capacitance=0.1µF, Capacitance Tolerance=±10%, Capacitor Case Style=1206[3216Metric], Dielectric Characteristic=X7R, Manufacturer=Kemet, Operating Temperature Max=125degC, Operating Temperature Min=-55degC, Package Description="2-Leads SMD, Body 3.2 x 1.6 mm", Package Reference=1206-2, Voltage Rating=50V, Datasheet URL=https://datasheet.ciiva.com/6125/1725438-6125494.pdf, Datasheet Version=Jul-13, Manufacturer URL=http://www.kemet.com/, Packaging=Tape&Reel, Product Range=KEMET-CSeries, SVHC=ToBeAdvised
C306A C306B: library part CMP-2006-03061-2, "CAP CER 50V X7R 0603 / LOW ESR!", Capacitance="0.10 μF", Manufacturer=KEMET, Manufacturer Part Number=C0603C104K5RACTU, Package=C0603C-CF, Temperature="-55°C to +125°C", Temperature Characteristic=X7R, Temperature Coefficient=30ppm/°C, Temperature Range High=+125°C, Temperature Range Low=-55°C, Tolerance=0.1, Voltage Rating="50 V", Automotive=Yes, Automotive Grade="Grade 1", Category=Cap, ComponentLink2Description=Datasheet, ComponentLink2URL=https://api.kemet.com/component-edge/download/datasheet/C0603C100J5GACAUTO.pdf, Device Class L1="Passive Components", Device Class L2=Capacitors, Device Class L3="Ceramic Capacitors", Digikey Description="CAP CER 0.1UF 50V X7R 0603", Height=0.87mm, Lead Free=Yes, Material=Ceramic, Octopart=https://octopart.com/c0603c104k5ractu-kemet-139244, RoHS=TRUE
C401A C401B: library part CMP-03017-000031-1, "CAP TANT 22UF 10% 6.3V 1411", Capacitance=22uF, Case Code (Imperial)=1411, Case Code (Metric)=3528, Dielectric Material=Tantalum, ESR (Equivalent Series Resistance)=3R, Leakage Current=6.3uA, Tolerance=10%, Voltage Rating=6.3V, Case/Package=1411, Depth=2.8mm, Dissipation Factor=15%, Features="General Purpose", Height=1.9mm, Height - Seated (Max)=0.083inch, Lead Free="Lead Free", Length=3.5mm, Mount="Surface Mount", Number of Pins=2, Polarity=Polar, REACH SVHC="No SVHC", Termination=SMD/SMT, Width=2.8mm
C500A C500B C501A C501B: library part CMP-2006-03061-2, "CAP 10 μF 20% 6.3V, 0603, X5R ceramic, eg: GRM188R60J106ME84D", Capacitance="10 μF", Manufacturer=MURATA, Manufacturer-part-number=GRM188R60J106ME84D, Package=0603, Temperature="-55°C to +85°C", Temperature Characteristic=X5R, Tolerance=20%, Voltage Rating=6V3, Category=Cap, ComponentLink2Description=Datasheet, ComponentLink2URL=https://api.kemet.com/component-edge/download/datasheet/C0603C100J5GACAUTO.pdf, Device Class L1="Passive Components", Device Class L2=Capacitors, Device Class L3="Ceramic Capacitors", Material=Ceramic, RoHS=TRUE
C502A C502B C503A C503B C504A C504B: library part CMP-2006-03061-2, "CAP 22 μF 20% 6.3V, 0603, X5R ceramic, eg: GRM188R60J226MEAOL", Capacitance="22 μF", Manufacturer=MURATA, Manufacturer-part-number=GRM188R60J226MEAOL, Package=0603, Temperature="-55°C to +85°C", Temperature Characteristic=X5R, Tolerance=20%, Voltage Rating=6V3, Category=Cap, ComponentLink2Description=Datasheet, ComponentLink2URL=https://api.kemet.com/component-edge/download/datasheet/C0603C100J5GACAUTO.pdf, Device Class L1="Passive Components", Device Class L2=Capacitors, Device Class L3="Ceramic Capacitors", Material=Ceramic, RoHS=TRUE
D700: library part CMP-1426-00006-6, "Green LED", Case Code (Imperial)=0603, Case Code (Metric)=1608, Color=Green, Forward Current=100mA, Forward Voltage=2V, Max Junction Temperature (Tj)=95°C, Max Operating Temperature=85°C, Max Reverse Voltage (DC)=5V, Min Operating Temperature=-40°C, Power Dissipation=72mW, Test Current=20mA, Case/Package=0603, Dominant Wavelength=570nm, Height=700µm, Length=1.6mm, Lens Style="Clear, Rectangular", Luminous Intensity=40mcd, Mount="Surface Mount", NexarPartId=29717778, Number of Pins=2, Packaging="Tape and Reel", Peak Wavelength=572nm, REACH SVHC=Unknown, Reverse Voltage=5V, RoHS=Compliant, Viewing Angle=140°, Wavelength=570nm, Width=800µm
D701 D702: library part CMP-1426-00006-6, Case Code (Imperial)=0603, Case Code (Metric)=1608, Color=Green, Forward Current=100mA, Forward Voltage=2V, Max Junction Temperature (Tj)=95°C, Max Operating Temperature=85°C, Max Reverse Voltage (DC)=5V, Min Operating Temperature=-40°C, Power Dissipation=72mW, Test Current=20mA, Case/Package=0603, Dominant Wavelength=570nm, Height=700µm, Length=1.6mm, Lens Style="Clear, Rectangular", Luminous Intensity=40mcd, Mount="Surface Mount", NexarPartId=29717778, Number of Pins=2, Packaging="Tape and Reel", Peak Wavelength=572nm, REACH SVHC=Unknown, Reverse Voltage=5V, RoHS=Compliant, Viewing Angle=140°, Wavelength=570nm, Width=800µm
J300A J300B J301A J301B: "Socket; DC supply; XT30; male; PIN: 2; on PCBs; THT; Colour: yellow", Package=None, Check_prices=https://www.snapeda.com/parts/XT30PW-M/AMASS/view-part/?ref=eda, MF=AMASS, MP=XT30PW-M, SnapEDA_Link=https://www.snapeda.com/parts/XT30PW-M/AMASS/view-part/?ref=snap
J600: library part "rpi connector", "GPIO Header for Raspberry Pi A+/B+/Pi 2/Pi 3 - 2x20 + 4 Cubesat pins", Manufacturer="SparkFun Electronics", Manufacturer Part Number=PRT-14017, Accessory Type=Connector, Category="Development Boards, Kits, Programmers", ComponentLink1Description=https://cdn.sparkfun.com/datasheets/Dev/RaspberryPi/12313.pdf, ComponentLink1URL=https://cdn.sparkfun.com/datasheets/Dev/RaspberryPi/12313.pdf, For Use With/Related Products="Raspberry Pi", Nils Minor=author, nilsminor@web.de=mail, Part Status=Active, Pricing 1="1=1.84 (EUR)", RoHS="RoHS Compliant", Stock 1=150
J700: library part CMP-17439-000165-2, "CONN HEADER R/A 6POS 2.5MM", Color=Natural, Contact Resistance=20mR, Current Rating=3A, Flammability Rating="UL94 V-0", Housing Color=White, Insulation Resistance=1GR, Max Operating Temperature=85°C, Max Voltage Rating (AC)=250V, Min Operating Temperature=-25°C, Package Quantity=500, Connector Type=Header, Contact Finish - Mating=TIN, Contact Material=Brass, Contact Plating=Tin, Contact Shape=Square, Contact Type="Male Pin", Depth=11.5mm, Fastening Type=Detent, Gender=Male, Housing Material=Polyamide, Insulation Color=Natural, Insulation Material=Nylon, Lead Free="Lead Free", Lead Pitch=2.5mm, Length=17.4mm, Max Current Rating=3A, Mount="Through Hole", Number of Contacts=6, Number of Positions=6, Number of Rows=1, Orientation="Right Angle", Packaging=Bulk, Pitch=2.5mm, REACH SVHC="No SVHC", Series=XH, Termination=Solder, Voltage Rating=250V, Voltage Rating (AC)=250V, Wire/Cable Gauge=22AWG
L200: library part CMP-06042-016438-1, "Multilayer Type Inductor for General Circuits, 0805 (2012), 0.22μH, 10%, 0.38Ω, 250mA", Case Code (Imperial)=0805, Case Code (Metric)=2012, Current Rating=250mA, DC Resistance (DCR)=380mR, Inductance=220nH, Inductance Tolerance=10%, Max Operating Temperature=85°C, Min Operating Temperature=-40°C, Package Quantity=4000, Self Resonant Frequency=220MHz, Test Frequency=25MHz, Case/Package=0805, Core Material=Ferrite, DC Current=250mA, Depth=1.45mm, Height=0.85mm, Height - Seated (Max)=0.041inch, Lead Free="Lead Free", Length=2mm, Max DC Current=250mA, Military Standard=Not, Mount="Surface Mount", Number of Pins=2, Packaging="Tape and Reel", Q Factor=20, Radiation Hardening=No, Rated Current-Max=250mA, REACH SVHC="No SVHC", RoHS Compliant=Yes, Series=LQM21N, Shielding=Shielded, Termination=SMD/SMT, Tolerance=10%, Width=1.25mm
L300A L300B: library part CMP-03913-130924348-2, "74438367100 Power Inductor, 10Uh, Shielded, 4.8A Rohs Compliant: Yes", Ambient Temperature Range High=85°C, Ambient Temperature Range Low=-40°C, Current Rating=3.3A, DC Resistance (DCR)=61mΩ, Inductance=10µH, Max Operating Temperature=125°C, Height=3.1mm, Length=5.4mm, Min Operating Temperature=-40°C, NexarPartId=130924348, RoHS=Compliant, Width=5.4mm
L500A L500B: library part CMP-02424-000354-1, "XFL4020-152ML / 1.5uH 4.6A 15.8mΩ 20%", Case Code (Metric)=4040, DC Resistance (DCR)=15.8mR, Inductance=1.5uH, Inductance Tolerance=20%, Manufacturer Part Number=XFL4020-152ML, Max DC Current="9.1 A", Max Operating Temperature=125°C, Min Operating Temperature=-40°C, Saturation Current=4.6A, Self Resonant Frequency=59MHz, Test Frequency=1MHz, Core Material=Composite, Mount="Surface Mount", Shielding=Shielded, Termination=SMD/SMT, Tolerance=20%
NT300A NT300B NT301A NT301B NT302A NT302B: "Net tie"
P200: library part CMP-1502-00021-2, Color=Black, Contact Resistance=20mΩ, Current Rating=3A, Flammability Rating="UL94 V-0", Insulation Resistance=1GΩ, Max Operating Temperature=105°C, Min Operating Temperature=-40°C, Operating Supply Voltage=250V, Connector Type="Male Pin", Contact Gender=Male, Contact Material=Copper, Contact Plating=Gold, Gender=Male, Height=8.85mm, Housing Material=PBT, Insulation=Insulated, Insulation Material=PBT, Lead Pitch=2.54mm, Length=20.36mm, Mount="Through Hole", NexarPartId=8917787, Number of Contacts=10, Number of Pins=10, Number of Positions=10, Number of Rows=2, Orientation="Right Angle", Pitch=2.54mm, REACH SVHC=Unknown, RoHS=Compliant, Row Spacing=2.54mm, Termination="Through Hole", Voltage Rating=250V, Voltage Rating (DC)=250V, Width=20.36mm
Q400A Q400B: "MOSFET P-CH 30V 45A SOP Advance", Drain current (DC)=-45A, Drain-source voltage (max)=-30V, Gate threshold voltage (max)=-2V, Gate-source voltage (max)=-25/+20V, RDS(ON) @ VGS = -10="2.4 mΩ"
Q700 Q701: library part CMP-0278-00001-1, "N-channel Enhancement Mode Field-Effect Transistor; 5.8A/30V", Drain-Source Voltage Limit="30 V", Gate-Source Voltage Limit="+/-12 V", Junction Temperature="-55 to 150 degC", Manufacturer="Alpha and Omega", Channel Type=N, ComponentLink1Description="Manufacturer URL", ComponentLink1URL=http://www.aosmd.com/, ComponentLink2Description=Datasheet, ComponentLink2URL=http://www.aosmd.com/res/data_sheets/AO3400.pdf, ComponentLink3Description="Package Specification", ComponentLink3URL=http://www.aosmd.com/res/packaging_information/SOT-23.pdf, DatasheetVersion="Rev.8, 12/2011", Mounting Technology="Surface Mount", PackageDescription="3-Pin SOT23, 3.016 x 2.8 mm Body, 0.95 mm Pitch", PackageReference=SOT23, PartNumber=AO3400, Storage Temperature="-55 to 150 degC"
R200 R204 R205 R206 R210 R500A R500B R502A R502B R701 R703: library part CMP-1012-00081-1, "10k 0.1W 5% 0603 SMD", Case-EIA=0603, Case-Metric=1608, Power="0.1 W", Tolerance="5 %", Technology=SMT
R201: library part CMP-1012-00081-1, "10k 0.1W 5% 0603  SMD", Case-EIA=0603, Case-Metric=1608, Power="0.1 W", Tolerance="5 %", Technology=SMT
R202 R203: library part CMP-1012-00081-1, "33k 0.1W 5% 0603 SMD", Case-EIA=0603, Case-Metric=1608, Power="0.1 W", Tolerance="5 %", Technology=SMT
R207 R208 R209: library part CMP-1012-00081-1, "100R 0.1W 5% 0603  SMD", Case-EIA=0603, Case-Metric=1608, Power="0.1 W", Tolerance="5 %", Technology=SMT
R300A R300B: library part CMP-07231-005482-1, "Thick Film Chip Resistors 0805 0.025Ω 0.125W 1% 100ppm/°C", Case Code (Imperial)=0805, Case Code (Metric)=2012, Max Operating Temperature=155°C, Max Power Dissipation=125mW, Min Operating Temperature=-55°C, Package Quantity=1, Resistance=1kR, Temperature Coefficient=100ppm/°C, Tolerance=1%, Voltage Rating=150V, Case/Package=0805, Composition="Thick Film", Contact Plating=Tin, Depth=1.25mm, Features="Moisture Resistant", Height=0.5mm, Length=2mm, Mount="Surface Mount", Number of Pins=2, Number of Terminations=2, Packaging="Tape and Reel", Power Rating=125mW, Radiation Hardening=No, REACH SVHC="No SVHC", Termination=SMD/SMT, Thickness=508um, Voltage Rating (DC)=150V, Width=1.25mm
R301A R301B R304A R304B R305A R305B: library part CMP-1012-00081-1, "2K 0.1W 5% 0603 (1608 Metric)  SMD", Case-EIA=0603, Case-Metric=1608, Power="0.1 W", Tolerance="5 %", Technology=SMT
R302A R302B: library part CMP-1012-00081-1, "10K 0.1W 5% 0603 (1608 Metric)  SMD", Case-EIA=0603, Case-Metric=1608, Power="0.1 W", Tolerance="5 %", Technology=SMT
R303A R303B: library part CMP-1012-00081-1, "1M 0.1W 1% 0603 SMD", Case-EIA=0603, Case-Metric=1608, Power="0.1 W", Tolerance="1 %", Technology=SMT
R306A R306B: library part CMP-1012-00081-1, "309k 0.1W 1% 0603 SMD", Case-EIA=0603, Case-Metric=1608, Power="0.1 W", Tolerance="1 %", Technology=SMT
R501A R501B: library part CMP-1012-00081-1, "1M 0.1W 1% 0603  SMD", Case-EIA=0603, Case-Metric=1608, Power="0.1 W", Tolerance="1 %", Technology=SMT
R503A R503B: library part CMP-1012-00081-1, "180k/110k 0.1W 1% 0603 (1608 Metric)  SMD", Case-EIA=0603, Case-Metric=1608, Power="0.1 W", Tolerance="1 %", Technology=SMT
R700 R702: library part CMP-1012-00081-1, "100R 0.1W 5% 0603 SMD", Case-EIA=0603, Case-Metric=1608, Power="0.1 W", Tolerance="5 %", Technology=SMT
R704: library part CMP-1012-00081-1, "1K 0.1W 5% 0603 SMD", Case-EIA=0603, Case-Metric=1608, Power="0.1 W", Tolerance="5 %", Technology=SMT
R705: library part CMP-1012-00081-1, "1k 0.1W 5% 0603 (1608 Metric)  SMD", Case-EIA=0603, Case-Metric=1608, Power="0.1 W", Tolerance="5 %", Technology=SMT
R706: library part CMP-1012-00081-1, "2k2 0.1W 5% 0603 SMD", Case-EIA=0603, Case-Metric=1608, Power="0.1 W", Tolerance="5 %", Technology=SMT
SW200 SW201 SW202: library part CMP-08834-000053-1, "SWITCH TACTILE SPST-NO 0.05A 24V", Actuator Color=Grey, Contact Current Rating=50mA, Contact Resistance=100mR, Max Operating Temperature=70°C, Max Voltage Rating (DC)=24V, Min Operating Temperature=-25°C, Operating Force=1.47N, Package Quantity=1000, Ratings=IP00, Actuator Length=1.6mm, Actuator Type=Standard, Contact Material=Gold, Contact Plating=Gold, Current Rating=50mA, Depth=7.85mm, Electrical Life=300000Cycles, Height=7.4mm, Illumination Type=Non-Illuminated, Lead Free="Lead Free", Length=7.3mm, Max Current Rating=50mA, Mechanical Life=300000Cycles, Mount="Through Hole", Number of Poles=1, Orientation="Right Angle", Packaging=Bulk, Radiation Hardening=No, RoHS Compliant=Yes, Series=B3F, Switch Function=Off-Mom, Switch Travel=0.25mm, Termination="PC Pins", Throw Configuration=SPST, Voltage Rating (DC)=24V, Weight=0.25g, Width=6.25mm
TP300A TP300B TP700 TP701: library part Test-point, "SMD test point"
U200: library part CMP-0243-00019-3, "ARM Cortex-M4 32-bit MCU+FPU, 210 DMIPS, 1024 kB Flash, 192 kB Internal RAM, 51 I/Os, 64-pin LQFP, -40 to 85 degC, Tray", I/Os (High Current)=51, Manufacturer=STMicroelectronics, Operating Frequency(F) (Processor speed) (MHz)=168, Supply Voltage(Vcc) max (V)=3.6, Supply Voltage(Vcc) min (V)=1.8, ComponentLink1Description="Manufacturer URL", ComponentLink1URL=http://www.st.com/web/en/home.html, ComponentLink2Description=Datasheet, ComponentLink2URL=http://www.st.com/st-web-ui/static/active/en/resource/technical/document/datasheet/DM00037051.pdf, ComponentLink3Description="Package Specification", ComponentLink3URL=http://www.st.com/st-web-ui/static/active/en/resource/technical/document/datasheet/DM00037051.pdf, Core="ARM Cortex-M4", D/A Converter=2x12-bit, DatasheetVersion="Rev. 4", FLASH Size (Prog) (kB)=1024, Internal RAM Size (kB)=192, Mounting Technology="Surface Mount", PackageDescription="64-Pin Low Profile Quad Flat Package, 10 x 10 mm Body, 0.5 mm Pitch", PackageReference=LQFP64, PackageVersion="Rev. 4, 06/2013", Packing=Tray, PartNumber=STM32F405RGT6
U300A U300B: library part CMP-0491-02169-2, "IC REG BUCK ADJ 2.5A 24QFN", Case/Package=QFN, Max Operating Temperature=125°C, Min Operating Temperature=-40°C, Output Current=2.5A, Output Voltage=40V, Package Quantity=2500, Switching Frequency=2MHz, Efficiency=96%, Lead Free="Lead Free", Number of Outputs=1, Number of Pins=24, Output Type=Adjustable, Packaging="Tape and Reel", RoHS Compliant=Yes, Series=-, Synchronous Rectifier=Yes
U400A U400B: library part CMP-0479-00425-2, "IC OR CTRLR SRC SELECT TSOT23-6", Case/Package=TSOT, Max Operating Temperature=85°C, Max Supply Voltage=28V, Min Operating Temperature=-40°C, Min Supply Voltage=2.5V, Package Quantity=1, Height=0.9mm, Lead Free="Lead Free", Length=2.9mm, Number of Channels=1, Number of Outputs=1, Number of Pins=6, Packaging="Tape and Reel", Radiation Hardening=No, REACH SVHC="No SVHC", RoHS Compliant=Yes, Series=PowerPath™, Turn-On Delay Time=110us, Width=1.75mm
U500A U500B: library part CMP-2000-07282-2, "IC REG BCK BST ADJ 3.5A 14VSON", Ambient Temperature Range High=+85°C, Ambient Temperature Range Low=-40°C, Manufacturer="Texas Instruments", Max Junction Temp=+125°C, Max Supply Voltage=5.5V, Min Supply Voltage=1.8V, Nominal Supply Current=25uA, Output Current=3A, Output Voltage=1.2-5.5V, Package=DSJ0014A, Switching Frequency=2400kHz, Temperature="-40°C to +85°C", Automotive=No, Category=IC, ComponentLink2Description=Datasheet, ComponentLink2URL=https://www.ti.com/lit/ds/symlink/tps63020.pdf, Device Class L1="Integrated Circuits (ICs)", Device Class L2="Power Management ICs", Device Class L3="Voltage Regulators - Switching", Digikey Description="IC REG BCK BST ADJ 3.5A 14VSON", Height=1mm, Lead Free=Yes, Manufacturer Part Number=TPS63020DSJT, Mouser Description="Voltage Regulators - Switching Regulators 93% Eff Buck-Boost Converter", Number of Outputs=1, Octopart=https://octopart.com/tps63020dsjt-texas+instruments-12976119, Output Type=AdjustableProgrammable, RoHS=TRUE, Standoff Height=0mm, Switching Topology=Buck-Boost, Temperature Range High=+85°C, Temperature Range Low=-40°C
Y200: library part CMP-18717-000311-1, "Crystal oscillator 8MHz", Case/Package=SMD/SMT, ESR (Equivalent Series Resistance)=100R, Frequency Stability=10ppm, Load Capacitance=10pF, Max Operating Temperature=70°C, Min Operating Temperature=-20°C, Package Quantity=3000, Depth=2.5mm, Frequency=8MHz, Frequency Tolerance=10ppm, Height=0.031inch, Length=3.2mm, Mount="Surface Mount", Number of Pins=4, Packaging="Tape and Reel", REACH SVHC="No SVHC", RoHS Compliant=Yes, Series=7M, Termination=SMD/SMT, Tolerance=10ppm, Width=0.098inch

## Via types
v1: diameter 0.5, hole 0.3, Top Layer to Bottom Layer, tented both sides, 828 vias
v2: diameter 0.35, hole 0.2, Top Layer to Bottom Layer, 30 vias
v3: diameter 0.5, hole 0.2, Top Layer to Bottom Layer, tented both sides, 16 vias
v4: diameter 5, hole 3, Top Layer to Bottom Layer, 4 vias

## Nets (pads, with @x,y where several pads share a name; then routed paths per layer and width w, separated by ;. In a path a pad name is that pad's centre, name@x,y a point inside that pad or via, vN(x,y) a via of type N, cw(c..) or ccw(c..) an arc to the next point about the centre after c; other vN are vias at no path point)
3,3V: C200.1 C201.1 C202.1 C203.1 C204.1 C205.1 C502A.1 C503A.1 C504A.1 D701.2 J600.41 J600.42 L200.1 R204.2 R205.2 R206.2 R501A.2 TP700.1 U200.1 U200.19 U200.32 U200.48 U200.64 U500A.4 U500A.5 | length 165
  Top Layer w0.2: J600.41@47.49,8.81 J600.41@47.664,8.636 ; 56.515,13.97 59.436,13.97 60.49,12.916 D701.2@61.341,12.916 61.341,12.192 61.976,11.557 TP700.1@63.5,11.557
  Top Layer w0.254: R206.2@44.4,64.6 44.4,65.5 44.813,65.913 v1(47.371,65.913) ; v1(52.7,63.7) 53.6,63.7 53.8,63.9 R205.2@53.8,64.6 v1(53.8,65.9) ; C201.1@63.754,61.376 v1(63.754,60.325) 63.754,59.746 63.87,59.63 U200.1@64.758,59.63 ; v1(76.708,60.198) 76.202,60.198 75.9,60.5 75.9,64.1 77.586,65.786 R204.2@80.226,65.786
  Top Layer w0.3: C205.1@66.202,64.008 66.202,63.211 v1(66.258,63.155) 66.608,62.805 U200.64@66.608,61.48 ; U200.19@67.608,50.28 67.608,48.851 68.006,48.453 C202.1@68.006,47.726 ; U200.32@74.108,50.28 74.108,49.551 74.129,49.53 C203.1@75.854,49.53 ; U200.48@75.958,59.63 76.687,59.63 76.708,59.651 v1(76.708,60.198) C204.1@76.708,61.122
  Top Layer w0.5: L200.1@59.531,52.197 59.563,52.165 v1(59.563,51.181) ; v1(64.9,51.2) 65,51.1 C200.1@65,49.5
  Top Layer w1: J600.41@47.49,8.81 47.586,8.906 47.586,9.828 48.171,10.414 50.8,10.414 53.086,12.7 55.245,12.7 56.642,14.097 56.642,17.78 59.817,20.955 v1(63.754,20.955) v1(64.389,21.59)
  Bottom Layer w0.254: v1(47.371,65.913) 47.377,65.907 53.793,65.907 v1(53.8,65.9) ; v1(52.7,63.7) 60.379,63.7 v1(63.754,60.325)
  Bottom Layer w0.5: v1(59.563,51.181) 65.308,51.181 v1(67.924,48.565) ; v1(66.258,63.155) 63.754,60.651 v1(63.754,60.325) 67.924,56.155 v1(67.924,48.565) ; v1(75.035,49.516) 68.876,49.516 ; v1(76.708,60.198) 74.676,60.198 72.898,58.42 72.898,53.538 68.876,49.516 ; v1(67.924,48.565) 68.876,49.516
  Bottom Layer w1: v1(63.754,20.955) v1(64.389,21.59) 69.723,26.924 69.723,41.529 67.924,43.328 v1(67.924,48.565)
3,3V_STLINK: P200.7 P200.8 | length 2.5
  Top Layer w0.5: P200.7@84.5,54.88 P200.8@87.04,54.88
3,3VDDA: C206.1 L200.2 U200.13 | length 5.6
  Top Layer w0.254: L200.2@61.881,52.197 61.881,53.079 61.433,53.527 C206.1@61.433,54.102 62.357,54.102 62.829,53.63 U200.13@64.758,53.63
5V: C502B.1 C503B.1 C504B.1 D702.2 J600.2 J600.4 R501B.2 TP701.1 U500B.4 U500B.5 | length 14.5
  Top Layer w0.2: TP701.1@70.231,11.557 72.057,11.557 72.644,12.144 D702.2@72.644,12.916 79.334,12.916 79.75,12.5 83.531,12.5 R501B.2@83.566,12.535
5V_STLINK: P200.9 P200.10 | length 2.5
  Top Layer w0.5: P200.9@84.5,52.34 P200.10@87.04,52.34
BIASA: NT302A.1 U300A.18 | length 1.4
  Top Layer w0.2: U300A.18@31.047,59.333 31.9,59.333 32.039,59.472 v1(32.121,59.472)
  Bottom Layer w0.254: NT302A.1@32.121,59.243 v1(32.121,59.472)
BIASB: NT302B.1 U300B.18 | length 1.4
  Top Layer w0.2: U300B.18@31.047,32.155 31.9,32.155 32.039,32.294 v1(32.121,32.294)
  Bottom Layer w0.254: NT302B.1@32.121,32.065 v1(32.121,32.294)
BOOT0: R210.2 U200.60 | length 5.4
  Top Layer w0.2: R210.2@67.602,66.04 68.326,66.04 68.608,65.758 U200.60@68.608,61.48
BSTA: C300A.1 U300A.16 | length 4
  Top Layer w0.2: U300A.16@31.047,58.333 31.832,58.333 32.177,57.988 33.925,57.988 34.143,57.77 C300A.1@34.143,57.135
BSTB: C300B.1 U300B.16 | length 4
  Top Layer w0.2: U300B.16@31.047,31.155 31.832,31.155 32.141,30.846 33.889,30.846 34.143,30.592 C300B.1@34.143,29.957
C_LED3V3: D701.1 R705.2 | length 2.2
  Top Layer w0.2: D701.1@61.341,14.516 R705.2@61.341,16.726
C_LED5V: D702.1 R706.2 | length 2.2
  Top Layer w0.2: D702.1@72.644,14.516 R706.2@72.644,16.726
C_LED_USR: D700.1 R704.2 | length 1.5
  Top Layer w0.254: R704.2@68.542,71.882 D700.1@68.542,73.406
EN_5V_3V3: J700.1 R502A.2 R502B.2 U500A.12 U500B.12 | length 62.7
  Top Layer w0.2: R502A.2@43.7,23.8 43.7,23.75 44.05,23.4 44.1,23.4 44.455,23.045 44.455,22.474 v1(45.364,21.565) 45.417,21.565 45.914,21.067 U500A.12@45.914,20.191 ; v1(67.945,28.575) 79.248,28.575 81.896,31.223 J700.1@82.91,31.223 ; R502B.2@80,22.4 82.883,22.4 v1(83.718,21.565) 83.771,21.565 84.268,21.067 U500B.12@84.268,20.191
  Bottom Layer w0.2: v1(45.364,21.565) 45.364,21.996 48.006,24.638 49.445,24.638 49.495,24.58 49.691,24.384 64.516,24.384 67.564,27.432 67.564,28.194 v1(67.945,28.575) ; J700.1@82.91,31.223 82.91,30.12 83.718,29.312 v1(83.718,21.565)
ENA: NT300A.2 U300A.4 | length 0.6
  Top Layer w0.242: NT300A.2@27.523,58.837 27.527,58.833 U300A.4@28.165,58.833
ENB: NT300B.2 U300B.4 | length 0.6
  Top Layer w0.242: NT300B.2@27.523,31.659 27.527,31.655 U300B.4@28.165,31.655
FB_TPS_A: R501A.1 R503A.2 U500A.3 | length 3.5
  Top Layer w0.2: R501A.1@45.212,14.135 45.212,15.583 R503A.2@45.25,15.621 45.25,16.421 45.848,17.019 45.906,17.077 45.906,17.383 U500A.3@45.914,17.391
FB_TPS_B: R501B.1 R503B.2 U500B.3 | length 3.5
  Top Layer w0.2: R501B.1@83.566,14.135 83.566,15.583 R503B.2@83.604,15.621 83.604,16.421 84.202,17.019 84.26,17.077 84.26,17.383 U500B.3@84.268,17.391
FBA: C303A.2 R303A.1 R306A.2 U300A.20 | length 5.3
  Top Layer w0.2: U300A.20@31.047,60.333 31.341,60.333 31.765,60.757 31.765,61.072 ; R306A.2@31.384,62.304 31.384,61.538 31.807,61.114 32.019,61.326 R303A.1@32.743,61.326 32.743,62.05 32.908,62.215 32.908,62.972 C303A.2@32.928,62.992
FBB: C303B.2 R303B.1 R306B.2 U300B.20 | length 5.3
  Top Layer w0.2: U300B.20@31.047,33.155 31.341,33.155 31.765,33.579 31.765,33.894 ; R306B.2@31.384,35.126 31.384,34.36 31.807,33.936 32.019,34.148 R303B.1@32.743,34.148 32.743,34.872 32.908,35.037 32.908,35.794 C303B.2@32.928,35.814
G1: Q700.1 R700.1 | length 2.2
  Top Layer w0.2: R700.1@72.771,36.258 74.054,36.258 74.204,36.408 Q700.1@74.95,36.408
G2: Q701.1 R702.1 | length 2.2
  Top Layer w0.2: R702.1@72.771,32.677 74.054,32.677 74.204,32.827 Q701.1@74.95,32.827